# EAGLE board Arduino Electrical-circuit (EAGLE 9.7.0)

Size 235.25 x 111.54 mm. Coordinates in mm from the lower left corner, seen from the top.
Outline: 0,0 235.25,0 235.25,111.54 0,111.54 0,0
Copper layers (1*16): Top 0.035mm / dielectric 1.5mm / Bottom 0.035mm
Design rules "default": minimum track width 6mil, minimum drill 0.35mm, track to track 6mil, track to pad 6mil, pad to pad 6mil, via to via 6mil, smd to smd 6mil, copper to edge 40mil, drill to drill 6mil, minimum pad ring 10mil, minimum via ring 8mil, stop-mask expansion 4mil, vias tented up to drill 0mil, thermal gap 10mil

## Footprints (pad centres in the part's own frame; a part is rotated, then mirrored left to right if it is on the bottom)
LEDRD254W60D565H860B_G = drill 0.981 pad 1.581: 1 -1.27,0; 2 1.27,0
RESAD1016W63L850D250B = drill 0.83 pad 1.43: 1 -5.08,0; 2 5.08,0
HA-06-SM065 = drill 1 pad 1.676: 1 -2.54,-2.54; 2 0,2.54; 3 2.54,-2.54
SWITCH-MOMENTARY-PTH-6.5MM = drill 1.016 pad 1.88: 1 -3.251,2.261; 2 3.251,2.261; 3 -3.251,-2.261; 4 3.251,-2.261
ARDUINO-UNO-R3-SHIELD = drill 1.016 pad 1.88: 3.3V 24.13,-2.54; 5V 24.13,0; A0 24.13,12.7; A1 24.13,15.24; A2 24.13,17.78; A3 24.13,20.32; A4 24.13,22.86; A5 24.13,25.4; AREF -24.13,-13.97; D2 -24.13,20.32; D3 -24.13,17.78; D4 -24.13,15.24; D5 -24.13,12.7; D6 -24.13,10.16; D7 -24.13,7.62; D8 -24.13,3.81; D9 -24.13,1.27; D10 -24.13,-1.27; D11 -24.13,-3.81; D12 -24.13,-6.35; D13 -24.13,-8.89; GND@0 24.13,2.54; GND@1 24.13,5.08; GND@2 -24.13,-11.43; IOREF 24.13,-7.62; NC 24.13,-10.16; RES 24.13,-5.08; RX -24.13,25.4; SCL -24.13,-19.05; SDA -24.13,-16.51; TX -24.13,22.86; VIN 24.13,7.62
LCD-I2C = drill 1.016 long: 1 -19.05,-5.08; 2 -19.05,-7.62; 3 -19.05,-10.16; 4 -19.05,-12.7
DIP762W53P254L1969H508Q16B = drill 0.743 pad 1.343: 1 -3.81,8.89; 2 -3.81,6.35; 3 -3.81,3.81; 4 -3.81,1.27; 5 -3.81,-1.27; 6 -3.81,-3.81; 7 -3.81,-6.35; 8 -3.81,-8.89; 9 3.81,-8.89; 10 3.81,-6.35; 11 3.81,-3.81; 12 3.81,-1.27; 13 3.81,1.27; 14 3.81,3.81; 15 3.81,6.35; 16 3.81,8.89

## Placement (x,y rotation side)
D1  GREEN  [LEDRD254W60D565H860B_G]  144.99,79.45 90 top
D2  GREEN  [LEDRD254W60D565H860B_G]  145.1,72.16 90 top
D3  GREEN  [LEDRD254W60D565H860B_G]  30.35,103.63 180 top
D4  GREEN  [LEDRD254W60D565H860B_G]  145.29,64.92 90 top
D5  GREEN  [LEDRD254W60D565H860B_G]  145.28,57.73 90 top
D6  GREEN  [LEDRD254W60D565H860B_G]  22.08,103.43 180 top
D7  GREEN  [LEDRD254W60D565H860B_G]  14.05,103.29 180 top
D8  GREEN  [LEDRD254W60D565H860B_G]  6.06,103.22 180 top
R1  10k  [RESAD1016W63L850D250B]  109.67,70.12 0 top
R2  220k  [RESAD1016W63L850D250B]  139.9,84.9 0 top
R3  10k  [RESAD1016W63L850D250B]  111.92,65.58 0 top
R4  10k  [RESAD1016W63L850D250B]  111.95,62.55 180 top
R5  10k  [RESAD1016W63L850D250B]  111.92,58.84 0 top
R6  220k  [RESAD1016W63L850D250B]  137.78,70.86 180 top
R7  220k  [RESAD1016W63L850D250B]  137.8,63.65 0 top
R8  220k  [RESAD1016W63L850D250B]  137.82,56.52 0 top
R9  220k  [RESAD1016W63L850D250B]  15.43,95.48 90 top
R10  220k  [RESAD1016W63L850D250B]  7.33,95.43 90 top
R11  220k  [RESAD1016W63L850D250B]  23.42,95.67 90 top
R12  220k  [RESAD1016W63L850D250B]  31.71,95.72 90 top
R13  10k  [RESAD1016W63L850D250B]  111.96,54.41 0 top
RPOTFLAT_1-_0-2_KW_LOAD  250k  [HA-06-SM065]  129.3,29.33 270 top
RPOTFLAT_2-_0-2_KW_LOAD  250k  [HA-06-SM065]  129.57,15.15 270 top
RPOTFLAT_3-_0-2_KW_LOAD1  250k  [HA-06-SM065]  115.45,7.05 180 top
RPOTSOLAR-_0-8_KW_AVAILABLE_POWER  250k  [HA-06-SM065]  133.47,95.83 270 top
SFLAT_4_ON-1_KW_LOAD  SWITCH_MOMENTARY  [SWITCH-MOMENTARY-PTH-6.5MM]  104.44,99.06 90 top
SFLAT_5_ON-_1_KW_LOAD  SWITCH_MOMENTARY  [SWITCH-MOMENTARY-PTH-6.5MM]  96.82,99.06 90 top
SFLAT_6_ON-_1_KW_LOAD  SWITCH_MOMENTARY  [SWITCH-MOMENTARY-PTH-6.5MM]  89.2,99.06 90 top
SFLAT_7_ON-_1_KW_LOAD  SWITCH_MOMENTARY  [SWITCH-MOMENTARY-PTH-6.5MM]  81.58,99.06 90 top
SFLAT_8-_ON-_1_KW_LOAD  SWITCH_MOMENTARY  [SWITCH-MOMENTARY-PTH-6.5MM]  112.06,99.06 90 top
U1  ARDUINO-UNO-R3-SHIELD  [ARDUINO-UNO-R3-SHIELD]  77.49,42.94 270 top
U2  LCD-16X2-I2CSUNFOUNDER-IIC  [LCD-I2C]  179.63,50.15 0 top
U3  74HC595_PDIP  [DIP762W53P254L1969H508Q16B]  59.99,99.06 90 top

## Library data of the parts
D1-D8 = Tinkercad; CATEGORY: Opto-Electronic; SUB-CATEGORY: LED; VALUE: LED_GREEN
R1-R13 RPOTFLAT_1-_0-2_KW_LOAD RPOTFLAT_2-_0-2_KW_LOAD RPOTFLAT_3-_0-2_KW_LOAD1 RPOTSOLAR-_0-8_KW_AVAILABLE_POWER SFLAT_4_ON-1_KW_LOAD SFLAT_5_ON-_1_KW_LOAD SFLAT_6_ON-_1_KW_LOAD SFLAT_7_ON-_1_KW_LOAD SFLAT_8-_ON-_1_KW_LOAD U1-U3 = Tinkercad

## Nets
D1_A: D1.1 R2.2
D2_A: D2.1 R6.1
D3_A: D3.1 R12.2
D4_A: D4.1 R7.2
D5_A: D5.1 R8.2
D6_A: D6.1 R11.2
D7_A: D7.1 R9.2
D8_A: D8.1 R10.2
U1_5V: RPOTFLAT_1-_0-2_KW_LOAD.3 RPOTFLAT_2-_0-2_KW_LOAD.3 RPOTFLAT_3-_0-2_KW_LOAD1.3 RPOTSOLAR-_0-8_KW_AVAILABLE_POWER.3 SFLAT_4_ON-1_KW_LOAD.1 SFLAT_4_ON-1_KW_LOAD.2 SFLAT_5_ON-_1_KW_LOAD.1 SFLAT_5_ON-_1_KW_LOAD.2 SFLAT_6_ON-_1_KW_LOAD.1 SFLAT_6_ON-_1_KW_LOAD.2 SFLAT_7_ON-_1_KW_LOAD.1 SFLAT_7_ON-_1_KW_LOAD.2 SFLAT_8-_ON-_1_KW_LOAD.1 SFLAT_8-_ON-_1_KW_LOAD.2 U1.5V U2.2 U3.10 U3.16
U1_A0: RPOTFLAT_1-_0-2_KW_LOAD.2 U1.A0
U1_A1: RPOTFLAT_2-_0-2_KW_LOAD.2 U1.A1
U1_A2: RPOTFLAT_3-_0-2_KW_LOAD1.2 U1.A2
U1_A3: RPOTSOLAR-_0-8_KW_AVAILABLE_POWER.2 U1.A3
U1_A4: U1.A4 U2.3
U1_A5: U1.A5 U2.4
U1_D2: R1.1 SFLAT_4_ON-1_KW_LOAD.3 SFLAT_4_ON-1_KW_LOAD.4 U1.D2
U1_D3: R3.1 SFLAT_5_ON-_1_KW_LOAD.3 SFLAT_5_ON-_1_KW_LOAD.4 U1.D3
U1_D4: R4.2 SFLAT_6_ON-_1_KW_LOAD.3 SFLAT_6_ON-_1_KW_LOAD.4 U1.D4
U1_D5: R5.1 SFLAT_7_ON-_1_KW_LOAD.3 SFLAT_7_ON-_1_KW_LOAD.4 U1.D5
U1_D6: U1.D6 U3.14
U1_D7: U1.D7 U3.11
U1_D8: U1.D8 U3.12
U1_D9: R13.1 SFLAT_8-_ON-_1_KW_LOAD.3 SFLAT_8-_ON-_1_KW_LOAD.4 U1.D9
U1_GND: D1.2 D2.2 D3.2 D4.2 D5.2 D6.2 D7.2 D8.2 R1.2 R3.2 R4.1 R5.2 R13.2 RPOTFLAT_1-_0-2_KW_LOAD.1 RPOTFLAT_2-_0-2_KW_LOAD.1 RPOTFLAT_3-_0-2_KW_LOAD1.1 RPOTSOLAR-_0-8_KW_AVAILABLE_POWER.1 U1.GND@0 U1.GND@1 U1.GND@2 U2.1 U3.8 U3.13
U3_Q0: R2.1 U3.15
U3_Q1: R6.2 U3.1
U3_Q2: R7.1 U3.2
U3_Q3: R8.1 U3.3
U3_Q4: R12.1 U3.4
U3_Q5: R11.1 U3.5
U3_Q6: R9.1 U3.6
U3_Q7: R10.1 U3.7

## Tracks (layer width: path | path; a pad name or v marks a point on that pad's centre or on a via)
D1_A  (1 unrouted)
D2_A  (1 unrouted)
D3_A  (1 unrouted)
D4_A  (1 unrouted)
D5_A  (1 unrouted)
D6_A  (1 unrouted)
D7_A  (1 unrouted)
D8_A  (1 unrouted)
U1_5V  (17 unrouted)
U1_A0  (1 unrouted)
U1_A1  (1 unrouted)
U1_A2  (1 unrouted)
U1_A3  (1 unrouted)
U1_A4  (1 unrouted)
U1_A5  (1 unrouted)
U1_D2  (3 unrouted)
U1_D3  (3 unrouted)
U1_D4  (3 unrouted)
U1_D5  (3 unrouted)
U1_D6  (1 unrouted)
U1_D7  (1 unrouted)
U1_D8  (1 unrouted)
U1_D9  (3 unrouted)
U1_GND  (22 unrouted)
U3_Q0  (1 unrouted)
U3_Q1  (1 unrouted)
U3_Q2  (1 unrouted)
U3_Q3  (1 unrouted)
U3_Q4  (1 unrouted)
U3_Q5  (1 unrouted)
U3_Q6  (1 unrouted)
U3_Q7  (1 unrouted)